# Altium PCB ADC_RS_MCU_draft.PcbDoc
Units mm, origin at the board's own origin, x right, y up, seen from the top; angles counter-clockwise.
Board outline 170 x 40 mm, 2 copper layers (Top Layer, Bottom Layer); 105 components, 74 nets, 361 pads, 0 vias.
Unrouted connection lines stored in the file: 245.
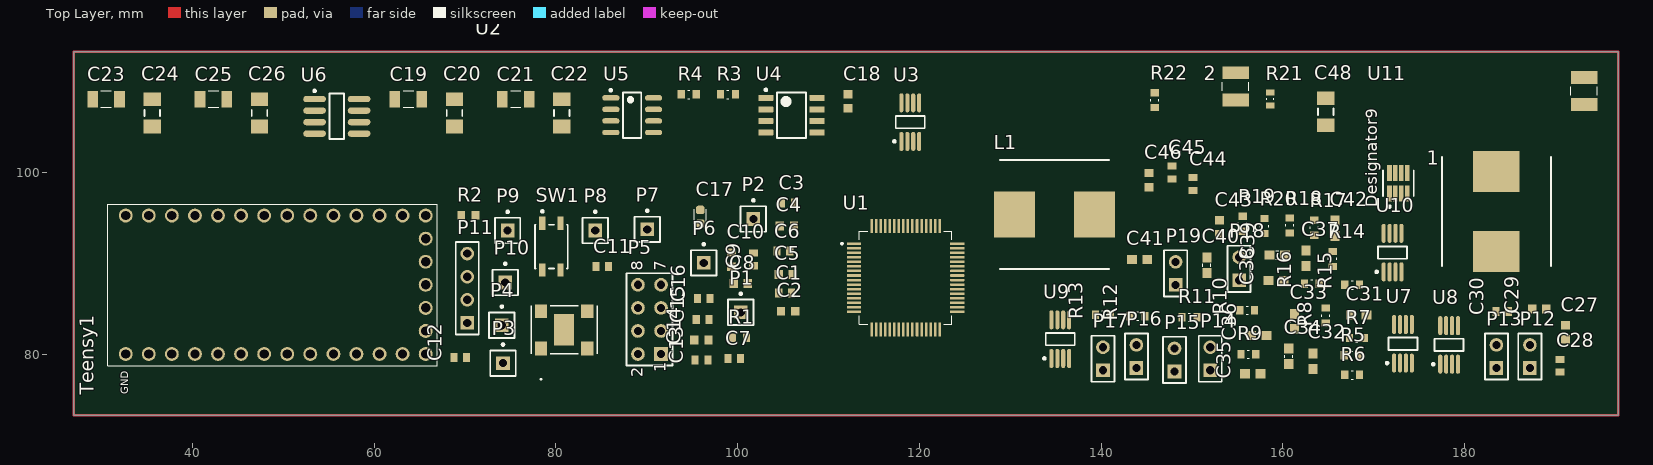
[diagram p0: Top Layer view]
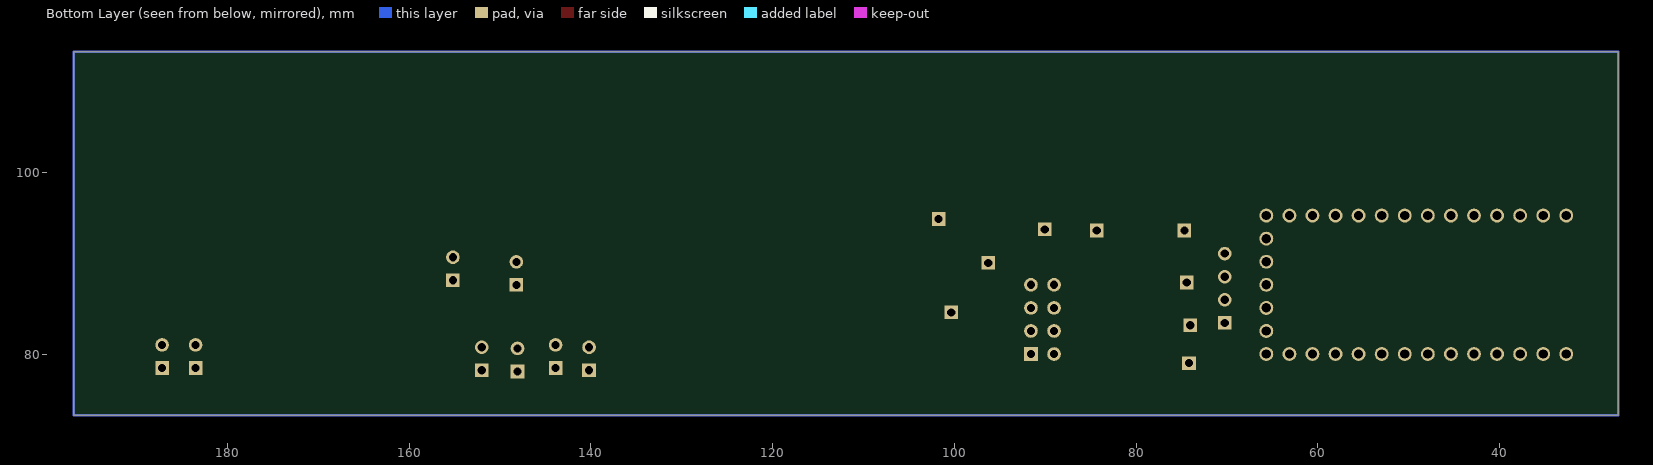
[diagram p1: Bottom Layer view, seen from below]

## Layer stack, top to bottom
Top Solder: solder mask 0.0102, Solder Resist, Dk 3.5
Top Layer: signal copper 0.0356
Dielectric 1: dielectric 0.32, FR-4, Dk 4.8
Bottom Layer: signal copper 0.0356
Bottom Solder: solder mask 0.0102, Solder Resist, Dk 3.5

## Board outline
26.924,73.279 26.924,113.279 196.924,113.279 196.924,73.279

## Design rules (kind name [scope] priority, off if disabled: settings)
Clearance [All] p1: gap=0.254 ignorepadtopadclearanceinfootprint=FALSE except(0: Arc-Hole Track-Hole SMDPad-Hole THPad-Hole Via-Hole Fill-Hole Poly-Hole Region-Hole Text-Hole)
PolygonConnect [All] p1: connectstyle=Relief reliefconductorwidth=0.254 reliefentries=4 polygonreliefangle="90 Angle" airgapwidth=0.254
RoomDefinition thvd8000 [InComponentClass('thvd8000')] p1: confinementstyle=ConfineIn formatcopy=TRUE lockcomponents=FALSE outline 129.921,95.758 195.072,95.758 195.072,112.141 129.921,112.141
RoomDefinition Vref [InComponentClass('Vref')] p2: confinementstyle=ConfineIn formatcopy=TRUE lockcomponents=FALSE outline 27.94,101.6 121.285,101.6 121.285,112.014 27.94,112.014
RoomDefinition driver0-3 [InComponentClass('driver0-3')] p3: confinementstyle=ConfineIn formatcopy=TRUE lockcomponents=FALSE outline 132.461,76.06 195.707,76.06 195.707,96.126 132.461,96.126
RoomDefinition ad7768 [InComponentClass('ad7768')] p4: confinementstyle=ConfineIn formatcopy=TRUE lockcomponents=FALSE outline 27.178,73.8 128.524,73.8 128.524,98.692 27.178,98.692
RoutingVias [All] p1: holewidth=0.711 width=1.27 viastyle="Through Hole" minholewidth=0.711 minwidth=1.27 maxholewidth=0.711 maxwidth=1.27
SolderMaskExpansion [All] p1: expansion=0.102 istentingtop=FALSE
Width [All] p1: maxlimit=0.254 minlimit=0.254 preferedwidth=0.254
30 further rules are at their usual default settings.

## Classes and differential pairs
component class Vref: C18 C19 C20 C21 C22 C23 C24 C25 C26 R3 R4 U3 U4 U5 U6
component class power_supply: 3 C50 C51
component class driver0-3: C27 C28 C29 C30 C31 C32 C33 C34 C35 C36 C37 C38 C39 C40 C41 C42 C43 C44 C45 C46 P12 P13 P14 P15 P16 P17 P18 P19 R5 R6 R7 R8 R9 R10 R11 R12 R13 R14 R15 R16 R17 R18 R19 R20 U7 U8 U9 U10
component class ad7768: C1 C2 C3 C4 C5 C6 C7 C8 C9 C10 C11 C12 C13 C14 C15 C16 C17 P1 P2 P3 P4 P5 P6 P7 P8 P9 P10 P11 R1 R2 SW1 Teensy1 U1 U2
component class accel: *1 R23 R24

## Components (designator, comment, footprint, x,y, rotation, side; value= is the part's Value field where it differs from the comment)
1 "MSS1278-124KLD" INDPM120120X805N 183.515,95.713 r90 top
2 "0.47uF-250V" CAPC3326X280N 154.813,109.474 r90 top
C1 "1u" CAPC1608X90N#1 105.221,86.754 r0 top
C2 "0.1uF" CAPC1608X90N#2 105.55,84.722 r0 top
C3 "1u" CAPC1608X90N#1 105.537,96.66 r0 top
C4 "0.1uF" CAPC1608X90N#2 105.423,94.12 r0 top
C5 "0.1uF" CAPC1608X90N#2 105.283,88.786 r0 top
C6 "1u" CAPC1608X90N#1 105.029,91.326 r0 top
C7 "1u" CAPC1608X90N#1 99.63,79.515 r0 top
C8 "0.1uF" CAPC1608X90N#2 100.33,87.757 r0 top
C9 "1u" CAPC1608X90N#1 101.727,90.424 r90 top
C10 "0.1uF" CAPC1608X90N#2 99.314,90.411 r90 top
C11 "1u" CAPC1608X90N#1 85.09,89.662 r0 top
C12 "1u" CAPC1608X90N#1 69.469,79.629 r180 top
C13 "1u" CAPC1608X90N#1 96.012,79.375 r180 top
C14 "0.1uF" CAPC1608X90N#2 96.012,81.534 r180 top
C15 "1u" CAPC1608X90N#1 96.139,83.82 r180 top
C16 "1u" CAPC1608X90N#1 96.266,86.106 r180 top
C17 "10uF" CAPC1608X9N 95.885,95.123 r90 top
C18 "0.1uF" CAPC1608X90N#2 112.141,107.823 r90 top
C19 "1u" CAPC3216X127N 63.754,108.077 r0 top
C20 "12065C104KAT2A" CAPC3216X94X50ML20T25 68.834,106.553 r90 top
C21 "1u" CAPC3216X127N 75.565,108.077 r0 top
C22 "12065C104KAT2A" CAPC3216X94X50ML20T25 80.645,106.553 r90 top
C23 "1u" CAPC3216X127N 30.48,108.077 r0 top
C24 "12065C104KAT2A" CAPC3216X94X50ML20T25 35.56,106.553 r90 top
C25 "1u" CAPC3216X127N 42.291,108.077 r0 top
C26 "12065C104KAT2A" CAPC3216X94X50ML20T25 47.371,106.553 r90 top
C27 "0.1uF" CAPC1608X90N#2 191.135,82.41 r90 top
C28 "1u" CAPC1608X90N#1 190.5,78.727 r90 top
C29 "0.1uF" CAPC1608X90N#2 188.227,84.95 r180 top
C30 "1u" CAPC1608X90N#1 184.15,84.696 r180 top
C31 "120pF" CAPC1608X90 168.363,84.315 r0 top
C32 "120pF" CAPC1608X90 163.322,79.235 r90 top
C33 "330pF" CAPC1608X90 161.29,83.592 r90 top
C34 "330pF" CAPC1608X90 160.655,79.743 r90 top
C35 "120pF" CAPC1608X90 156.718,77.838 r180 top
C36 "120pF" CAPC1608X90 157.353,82.029 r180 top
C37 "120pF" CAPC1608X90 162.56,90.538 r90 top
C38 "120pF" CAPC1608X90 159.258,88.125 r180 top
C39 "330pF" CAPC1608X90 159.385,90.919 r180 top
C40 "330pF" CAPC1608X90 151.638,89.776 r90 top
C41 "120pF" CAPC1608X90 144.233,90.411 r0 top
C42 "120pF" CAPC1608X90 165.735,93.84 r90 top
C43 "0.1uF" CAPC1608X90N#2 153.035,93.967 r90 top
C44 "1u" CAPC1608X90N#1 150.114,98.728 r90 top
C45 "1u" CAPC1608X90N#1 147.828,99.998 r90 top
C46 "0.1uF" CAPC1608X90N#2 145.288,99.161 r90 top
C48 "100nF" CAPC3216X94X50ML20T25 164.719,106.68 r90 top
L1 "MSS1278-124KLD" INDPM120120X805N 134.874,95.377 r0 top
P1 "Plug" PIN1 100.33,84.595 r0 top
P2 "Plug" PIN1 101.727,94.869 r0 top
P3 "Plug" PIN1 74.168,79.007 r0 top
P4 "Plug" PIN1 74.041,83.185 r0 top
P5 "Header 4X2" HDR2X4 91.567,80.01 r90 top
P6 "Plug" PIN1 96.266,90.043 r0 top
P7 "Plug" PIN1 90.043,93.726 r0 top
P8 "Plug" PIN1 84.328,93.612 r0 top
P9 "Plug" PIN1 74.676,93.612 r0 top
P10 "Plug" PIN1 74.422,87.884 r0 top
P11 "Header 4" HDR1X4 70.231,83.439 r90 top
P12 "Header 2" HDR1X2 187.198,78.473 r90 top
P13 "Header 2" HDR1X2 183.515,78.473 r90 top
P14 "Header 2" HDR1X2 152.019,78.219 r90 top
P15 "Header 2" HDR1X2 148.082,78.092 r90 top
P16 "Header 2" HDR1X2 143.891,78.473 r90 top
P17 "Header 2" HDR1X2 140.208,78.219 r90 top
P18 "Header 2" HDR1X2 155.194,88.125 r90 top
P19 "Header 2" HDR1X2 148.209,87.617 r90 top
R1 "100" RESC1508X55N 100.194,81.801 r0 top
R2 "ESR03EZPF1001" RESC1608X55N#1 70.358,95.263 r0 top
R3 "1k" RESC1608X55N#2 98.933,108.585 r0 top
R4 "2k" RESC1608X55N#2 94.615,108.585 r0 top
R5 "33" RESC1608X55N#2 167.582,79.87 r0 top
R6 "33" RESC1608X55N#2 167.64,77.711 r0 top
R7 "1M" RESC1608X55N#2 168.148,81.775 r0 top
R8 "1M" RESC1608X55N#2 164.719,84.246 r90 top
R9 "33" RESC1608X55N#2 156.21,79.997 r0 top
R10 "33" RESC1608X55N#2 156.083,84.823 r180 top
R11 "1M" RESC1608X55N#2 149.733,84.061 r0 top
R12 "1M" RESC1608X55N#2 144.018,84.188 r180 top
R13 "1M" RESC1608X55N#2 140.208,84.315 r180 top
R14 "33" RESC1608X55N#2 165.481,90.48 r90 top
R15 "33" RESC1608X55N#2 167.64,87.617 r180 top
R16 "1M" RESC1608X55N#2 163.195,87.744 r180 top
R17 "33" RESC1608X55N#2 163.449,93.909 r90 top
R18 "33" RESC1608X55N#2 160.782,94.163 r90 top
R19 "1M" RESC1608X55N#2 155.575,94.348 r90 top
R20 "1M" RESC1608X55N#2 157.988,94.094 r90 top
R21 "120" RES_ERA3AEB121V 158.623,108.077 r90 top
R22 "1.5k" RESC1608X55N#2 145.923,107.95 r90 top
SW1 "EVQ-P2202M" FP-EVQ-P2202M-MFG 79.502,91.834 r0 top
Teensy1 "DEV-15583" MODULE_DEV-15583 49.149,87.63 r90 top
U1 "AD7768-4BSTZ" QFP50P1200X1200X160-64N 118.491,88.405 r0 top
U2 "DSC1001AI2-032.7680" DFN4_7X5_MCH 80.899,82.677 r90 top
U3 "ADR435BRMZ-R7" ADI-RM-8_M 118.999,105.537 r90 top
U4 "REG103UA-5" D0008A_M 105.918,106.299 r0 top
U5 "ADR4533BRZ" ADI-R-8_L 88.392,106.299 r0 top
U6 "ADR4540BRZ" ADI-R-8_M 55.88,106.172 r0 top
U7 "ADA4841-2YRMZ-RL" ADI-RM-8_M 173.228,81.14 r90 top
U8 "ADA4841-2YRMZ-RL" ADI-RM-8_M 178.308,81.013 r90 top
U9 "ADA4841-2YRMZ-RL" ADI-RM-8_M 135.509,81.648 r90 top
U10 "ADA4841-2YRMZ-RL" ADI-RM-8_M 172.085,91.173 r90 top
U11 "THVD8000DDFR" DDF0008A-IPC_A 172.72,98.806 r90 top
? "0.47uF-250V" CAPC3326X280N 193.167,108.966 r90 top

## Footprints (in the part's own frame and the unit in brackets; to place one, negate y for a bottom-side part, rotate by r counter-clockwise, add the part's x,y. Pads: shape width x height; smd on the part's side, far side on the other; paste and mask are expansions set on the pad)
ADI-R-8_L [mm] "SOIC, 8-Leads, Body 4.9x3.9mm, Pitch 1.27mm, IPC High Density"
  oval 1.9x0.6 smd: 1(-2.35,1.905) 2(-2.35,0.635) 3(-2.35,-0.635) 4(-2.35,-1.905) 5(2.35,-1.905) 6(2.35,-0.635) 7(2.35,0.635) 8(2.35,1.905)
  silkscreen extent -2.47,-2.5 1,2.88, body extent -2,-2.5 2,2.5, height 1.75
ADI-R-8_M [mm] "SOIC, 8-Leads, Body 4.9x3.9mm, Pitch 1.27mm, IPC Low Density"
  oval 2.5x0.7 smd: 1(-2.45,1.905) 2(-2.45,0.635) 3(-2.45,-0.635) 4(-2.45,-1.905) 5(2.45,-1.905) 6(2.45,-0.635) 7(2.45,0.635) 8(2.45,1.905)
  silkscreen extent -2.57,-2.5 0.8,2.93, body extent -2,-2.5 2,2.5, height 1.75
ADI-RM-8_M [mm] "SOP, 8-Leads, Body 3x3mm, Pitch 0.65mm, IPC Low Density"
  oval 2.1x0.45 smd: 1(-2.125,0.975) 2(-2.125,0.325) 3(-2.125,-0.325) 4(-2.125,-0.975) 5(2.125,-0.975) 6(2.125,-0.325) 7(2.125,0.325) 8(2.125,0.975)
  silkscreen extent -2.25,-1.6 0.67,1.87, body extent -1.6,-1.6 1.6,1.6, height 1.1
CAPC1608X9N [mm]
  rrect50% 0.93x0.93 smd: 1(-0.75,0) 2(0.75,0)
  silkscreen extent -0.8,-0.64 0.8,0.64, body extent -0.8,-0.4 0.8,0.4, height 0.4
CAPC1608X90 [mm]
  rect 1.1x1 smd: 1(-0.85,0) 2(0.85,0)
  body extent -0.8,-0.41 0.8,0.41, height 0.45
CAPC1608X90N#1 [mm]
  rect 0.78x0.99 smd: 1(-0.7,0) 2(0.7,0)
  body extent -0.8,-0.41 0.8,0.41, height 0.9
CAPC1608X90N#2 [mm]
  rect 0.92x0.98 smd: 1(-0.775,0) 2(0.775,0)
  body extent -0.8,-0.41 0.8,0.41, height 0.9
CAPC3216X94X50ML20T25 [mm] "Chip Capacitor, 2-Leads, Body 3.20x1.60mm, IPC Low Density"
  rect 1.5x1.9 smd: 1(-1.5,0) 2(1.5,0)
  silkscreen extent -0.35,-0.85 0.35,0.85, body extent -1.7,-0.9 1.7,0.9, height 0.94
CAPC3216X127N [mm]
  rect 1.16x1.82 smd: 1(-1.475,0) 2(1.475,0)
  silkscreen extent -0.57,-0.9 0.57,0.9, body extent -1.6,-0.8 1.6,0.8, height 1.27
CAPC3326X280N [mm]
  rect 1.42x2.91 smd: 1(-1.492,0) 2(1.492,0)
  silkscreen extent -0.46,-1.45 0.46,1.45, body extent -1.65,-1.3 1.65,1.3, height 2.8
D0008A_M [mm] "SOIC, 8-Leads, Body 5x4mm, Pitch 1.27mm, IPC Low Density"
  rrect15% 1.65x0.65 smd: 1(-2.825,1.905) 2(-2.825,0.635) 3(-2.825,-0.635) 4(-2.825,-1.905) 5(2.825,-1.905) 6(2.825,-0.635) 7(2.825,0.635) 8(2.825,1.905)
  silkscreen extent -2.95,-2.5 1.6,2.9, body extent -3,-2.45 3,2.45, height 1.63
DDF0008A-IPC_A [mm]
  rect 1.757x0.512 smd paste+0 mask+0: 1(-1.151,0.975) 2(-1.151,0.325) 3(-1.151,-0.325) 4(-1.151,-0.975) 5(1.151,-0.975) 6(1.151,-0.325) 7(1.151,0.325) 8(1.151,0.975)
  silkscreen extent -2.7,-1.7 1.4,1.7, body extent 0,0 0.25,0.25, height 0.25
DFN4_7X5_MCH [mm]
  rect 1.505x1.349 smd paste+0 mask+0: 1(-2.052,2.54) 2(-2.052,-2.54) 3(2.052,-2.54) 4(2.052,2.54)
  rect 3.5x2.2 smd paste+0 mask+0: 5(0,0)
  silkscreen extent -5.52,-3.63 2.63,3.63, body extent -2.5,-3.5 2.5,3.5, height 0.85
FP-EVQ-P2202M-MFG [mm]
  rect 0.7x1.45 smd paste+0 mask+0: 1(-1,2.575) 2(1,2.575) 3(-1,-2.575) 4(1,-2.575)
  silkscreen extent -1.8,-2.4 1.8,4, body extent -1.9,-3.4 1.9,3.4, height 0.25
HDR1X2 [mm] "Connector; Header; 2 Position"
  rect 1.5x1.5 hole 0.9: 1(0,0)
  round 1.5 hole 0.9: 2(2.54,0)
  silkscreen extent -1.27,-1.27 3.81,1.27
HDR1X4 [mm] "Connector; Header; 4 Position"
  rect 1.5x1.5 hole 0.9: 1(0,0)
  round 1.5 hole 0.9: 2(2.54,0) 3(5.08,0) 4(7.62,0)
  silkscreen extent -1.27,-1.27 8.89,1.27
HDR2X4 [mm] "Connector; Header; 4x2 Position"
  rect 1.5x1.5 hole 0.9: 1(0,0)
  round 1.5 hole 0.9: 2(0,2.54) 3(2.54,0) 4(2.54,2.54) 5(5.08,0) 6(5.08,2.54) 7(7.62,0) 8(7.62,2.54)
  silkscreen extent -1.27,-1.27 8.89,3.81
INDPM120120X805N [mm]
  rect 4.5x5.1 smd: 1(-4.4,0) 2(4.4,0)
  silkscreen extent -6,-6 6,6, body extent -6,-6 6,6, height 8.05
MODULE_DEV-15583 [mm]
  round 1.53 hole 1.02: 0(-7.62,13.97) 1(-7.62,11.43) 2(-7.62,8.89) 3(-7.62,6.35) 3.3V_1(-2.54,-16.51) 3.3V_2(7.62,11.43) 4(-7.62,3.81) 5(-7.62,1.27) 6(-7.62,-1.27) 7(-7.62,-3.81) 8(-7.62,-6.35) 9(-7.62,-8.89) 10(-7.62,-11.43) 11(-7.62,-13.97) 12(-7.62,-16.51) 13(7.62,-16.51) 14(7.62,-13.97) 15(7.62,-11.43) 16(7.62,-8.89) 17(7.62,-6.35) 18(7.62,-3.81) 19(7.62,-1.27) 20(7.62,1.27) 21(7.62,3.81) 22(7.62,6.35) 23(7.62,8.89) G1(-7.62,16.51) G2(0,-16.51) G3(7.62,13.97) ON-OFF(5.08,-16.51) PGM(2.54,-16.51) VBAT(-5.08,-16.51) VIN(7.62,16.51)
  silkscreen extent -8.89,-17.78 8.89,18.48
PIN1 [mm] "Connector; Plug"
  rect 1.5x1.5 hole 0.9: 1(0,0)
  silkscreen extent -1.4,-1.4 1.4,2.17
QFP50P1200X1200X160-64N [mm]
  rrect25% 1.56x0.28 smd mask+0.051: 1(-5.68,3.75) 2(-5.68,3.25) 3(-5.68,2.75) 4(-5.68,2.25) 5(-5.68,1.75) 6(-5.68,1.25) 7(-5.68,0.75) 8(-5.68,0.25) 9(-5.68,-0.25) 10(-5.68,-0.75) 11(-5.68,-1.25) 12(-5.68,-1.75) 13(-5.68,-2.25) 14(-5.68,-2.75) 15(-5.68,-3.25) 16(-5.68,-3.75) 33(5.68,-3.75) 34(5.68,-3.25) 35(5.68,-2.75) 36(5.68,-2.25) 37(5.68,-1.75) 38(5.68,-1.25) 39(5.68,-0.75) 40(5.68,-0.25) 41(5.68,0.25) 42(5.68,0.75) 43(5.68,1.25) 44(5.68,1.75) 45(5.68,2.25) 46(5.68,2.75) 47(5.68,3.25) 48(5.68,3.75)
  rrect25% 0.28x1.56 smd mask+0.051: 17(-3.75,-5.68) 18(-3.25,-5.68) 19(-2.75,-5.68) 20(-2.25,-5.68) 21(-1.75,-5.68) 22(-1.25,-5.68) 23(-0.75,-5.68) 24(-0.25,-5.68) 25(0.25,-5.68) 26(0.75,-5.68) 27(1.25,-5.68) 28(1.75,-5.68) 29(2.25,-5.68) 30(2.75,-5.68) 31(3.25,-5.68) 32(3.75,-5.68) 49(3.75,5.68) 50(3.25,5.68) 51(2.75,5.68) 52(2.25,5.68) 53(1.75,5.68) 54(1.25,5.68) 55(0.75,5.68) 56(0.25,5.68) 57(-0.25,5.68) 58(-0.75,5.68) 59(-1.25,5.68) 60(-1.75,5.68) 61(-2.25,5.68) 62(-2.75,5.68) 63(-3.25,5.68) 64(-3.75,5.68)
  silkscreen extent -7.11,-5.1 5.1,5.1
RES_ERA3AEB121V [mm]
  rect 0.65x0.9 smd: 1(-0.725,0) 2(0.725,0)
  silkscreen extent -0.08,-0.4 0.08,0.4, body extent -0.8,-0.4 0.8,0.4, height 0.45
RESC1508X55N [mm]
  rect 0.81x0.98 smd: 1(-0.771,0) 2(0.771,0)
  body extent -0.77,-0.43 0.77,0.43, height 0.55
RESC1608X55N#1 [mm]
  rect 0.87x0.93 smd: 1(-0.78,0) 2(0.78,0)
  body extent -0.8,-0.4 0.8,0.4, height 0.55
RESC1608X55N#2 [mm]
  rect 0.79x0.93 smd: 1(-0.82,0) 2(0.82,0)
  silkscreen extent -0.11,-0.45 0.11,0.45, body extent -0.8,-0.4 0.8,0.4, height 0.55

## Part data
1 L1: "Inductor", Manufacturer_Name=COILCRAFT, Datasheet Link=https://componentsearchengine.com/Datasheets/1/MSS1278-124KLD.pdf, Height=8.05mm, Manufacturer_Part_Number=MSS1278-124KLD
2 ?: library part C1210X474KARACAUTO, Package=None, Availability=Unavailable, MF="{'manufacturer': u'KEMET'}", MP=C1210X474KARACAUTO, Price=None
C1 C3 C6 C7 C9 C11 C12 C13 C15 C16 C28 C30 C44 C45: library part 0603YC105MAT4A, "Capacitor", Manufacturer_Name=AVX, Datasheet Link=https://componentsearchengine.com/Datasheets/1/06031A100FAT2A.pdf, Height=0.9mm, Manufacturer_Part_Number=0603YC105MAT4A
C2 C4 C5 C8 C10 C14 C18 C27 C29 C43 C46: library part 06033D104KAT2A, "Cap Ceramic 0.1uF 25V X5R 10% SMD 0603 85ÂÂŽ T/R", Package=None, Availability=Unavailable, MF="{'manufacturer': u'AVX'}", MP=06033D104KAT2A, Price=None
C17: library part GRT188R61A106ME13D, "CAP CER 10UF 10V X5R 0603", Package=None, Availability=Unavailable, MF="{'manufacturer': u'Murata'}", MP=GRT188R61A106ME13D, Price=None
C19 C21 C23 C25: library part 1206YC105KAT2A, "Cap Ceramic 1uF 16V X7R 10% SMD 1206 125ÂÂŽ T/R", Package=None, Availability=Unavailable, MF="{'manufacturer': u'AVX'}", MP=1206YC105KAT2A, Price=None
C20 C22 C24 C26: library part CMP-2000-05018-1, "Chip Capacitor, Ceramic, 100 nF, 10%, 50 V, 1206, RoHS, Tape and Reel", Capacitance=100nF, Case Size/Dimension=1206, Dielectric=X7R, Manufacturer=AVX, Rated Voltage=50V, Tolerance (%)=±10%, Datasheet URL=http://www.mouser.com/ds/2/40/cauto-360.pdf, Datasheet Version=Sep-14, Manufacturer URL=http://www.avx.com/
C31 C32 C35 C36 C37 C38 C41 C42: library part 06035A121GAT2A, "0603 120 pF 50 V Â±2 % Tolerance C0G/NP0 SMT Multilayer Ceramic Capacitor", Package=None, Availability=Unavailable, MF="{'manufacturer': u'AVX'}", MP=06035A121GAT2A, Price=None
C33 C34 C39 C40: library part 06033A331GAT2A, "0603 SMD Ceramic Capacitors 0603 330pF 25volts C0G 2%", Package=None, Availability=Unavailable, MF="{'manufacturer': u'AVX'}", MP=06033A331GAT2A, Price=None
C48: library part CMP-2000-05018-1, "Chip Capacitor, Ceramic, 100 nF, 10%, 50 V, 1206, RoHS, Tape and Reel", Case Size/Dimension=1206, Dielectric=X7R, Manufacturer=AVX, Rated Voltage=50V, Tolerance (%)=±10%, Capacitance=100nF, Datasheet URL=http://www.mouser.com/ds/2/40/cauto-360.pdf, Datasheet Version=Sep-14, Manufacturer URL=http://www.avx.com/
P5: "Header, 4-Pin, Dual row", LatestRevisionDate=17-Jul-2002, LatestRevisionNote="Re-released for DXP Platform.", Publisher="Altium Limited"
P11: "Header, 4-Pin", LatestRevisionDate=17-Jul-2002, LatestRevisionNote="Re-released for DXP Platform.", Publisher="Altium Limited"
P12 P13 P14 P15 P16 P17 P18 P19: "Header, 2-Pin", LatestRevisionDate=17-Jul-2002, LatestRevisionNote="Re-released for DXP Platform.", Publisher="Altium Limited"
R1: library part MCT0603MD1000DP500, Package=None, Availability=Unavailable, MF="{'manufacturer': u'Vishay'}", MP=MCT0603MD1000DP500, Price=None
R2: "Res 0603 1K Ohm 1% 1/4W Â±100ppm/Â°C Molded SMD Paper T/R", Package=None, Availability=Unavailable, MF="{'manufacturer': u'Rohm'}", MP=ESR03EZPF1001, Price=None
R3 R4 R5 R6 R9 R10 R14 R15 R17 R18: library part RT0603BRD0733RL, "RES SMD 33 OHM 0.1% 1/10W 0603", Package=None, Availability=Unavailable, MF="{'manufacturer': u'Yageo'}", MP=RT0603BRD0733RL, Price=None
R7 R8 R11 R12 R13 R16 R19 R20: library part RT0603DRD071ML, Package=None, Availability=Unavailable, MF="{'manufacturer': u'Yageo'}", MP=RT0603DRD071ML, Price=None
R21: library part ERA3AEB121V, Package=None, Availability=Unavailable, MF="{'manufacturer': u'Panasonic'}", MP=ERA3AEB121V, Price=None
R22: library part RT0603BRD071K5L, Package=None, Availability=Unavailable, MF="{'manufacturer': u'Yageo'}", MP=RT0603BRD071K5L, Price=None
SW1: library part CMP-05618-000029-1, "SWITCH TACTILE SPST-NO 0.02A 15V", Actuator Color=Natural, Contact Current Rating=20mA, Contact Resistance=100mR, Max Operating Temperature=85°C, Max Voltage Rating (DC)=15V, Min Operating Temperature=-40°C, Operating Force=1.6N, Package Quantity=1, Actuator Length=0.45mm, Color=Natural, Contact Plating=Gold, Current Rating=20mA, Depth=5.5mm, Electrical Life=1000000Cycles, Height=2.1mm, Illumination Type=Non-Illuminated, Lead Free="Lead Free", Length=3.5mm, Max Current Rating=20mA, Mechanical Life=1000000Cycles, Mount="Surface Mount", Orientation=Straight, Packaging="Tape and Reel", Radiation Hardening=No, REACH SVHC="No SVHC", Series=EVQP2, Size=3.5mm, Switch Function=Off-Mom, Switch Travel=0.25mm, Termination=J-Bend, Throw Configuration=SPST, Voltage Rating (DC)=15V
Teensy1: "RT1062 Teensy 4.0 i.MX ARMÂ® CortexÂ®-M7 MPU Embedded Evaluation Board", Package=None, Digi-Key_Part_Number=1568-DEV-15583-ND, Digi-Key_Purchase_URL=https://www.digikey.com/product-detail/en/sparkfun-electronics/DEV-15583/1568-DEV-15583-ND/10384551?utm_source=snapeda&utm_medium=aggregator&utm_campaign=symbol, MF="SparkFun Electronics", MP=DEV-15583, SnapEDA_Link=https://www.snapeda.com/parts/DEV-15583/SparkFun%20Electronics/view-part/4001229/?ref=snap
U1: "24 Bit Analog to Digital Converter 4 Input 4 Sigma-Delta 64-LQFP _10x10_", Package="LQFP -64 Analog Devices", Digi-Key_Part_Number=AD7768-4BSTZ-ND, Digi-Key_Purchase_URL=https://www.digikey.com/product-detail/en/analog-devices-inc/AD7768-4BSTZ/AD7768-4BSTZ-ND/6072260?utm_source=snapeda&utm_medium=aggregator&utm_campaign=symbol, MF="Analog Devices", MP=AD7768-4BSTZ, SnapEDA_Link=https://www.snapeda.com/parts/AD7768-4BSTZ/Analog%20Devices%20Inc./view-part/501603/?ref=snap
U2: "No Description Available", Mfr_Name=Microchip, Copyright="Copyright (C) 2021 Ultra Librarian. All rights reserved.", Digi-Key_Part_Number_1=DSC1001AI2-032.7680-ND, Manufacturer_Part_Number=DSC1001AI2-032.7680, RefDes=RefDes, Type=DEV
U3: library part CMP-0784-00373-1, "Ultralow Noise XFET Voltage Reference with Current Sink and Source Capability, 5 V Output, 7 to 18 V Supply, Industrial, 8-pin SOP (RM-8), Reel", Manufacturer="Analog Devices", Operating Temp Range="-40 to 125 degC", Code_JEDEC=MO-187-AA, ComponentLink1Description="Manufacturer URL", ComponentLink1URL=http://www.analog.com/en/index.html, ComponentLink2Description=Datasheet, ComponentLink2URL=http://www.analog.com/static/imported-files/data_sheets/ADR430_431_433_434_435_439.pdf, ComponentLink3Description="Package Specification", ComponentLink3URL=http://www.analog.com/static/imported-files/packages/PKG_PDF/MSOP%28RM%29/RM_8.pdf, ComponentLink4Description="URL Link1", ComponentLink4URL="Product URL:http://www.analog.com/en/special-linear-functions/voltage-references/adr435/products/product.html", DatasheetVersion="Rev. J", Max V Supply (V)=18, Min V Supply (V)=7, Mounting Technology="Surface Mount", PackageDescription="8-Pin Mini Small Outline Package, Body 3 x 3 mm, Pitch 0.65 mm", PackageReference=RM-8, PackageVersion=Aug-05, Packing=Reel, PartNumber=ADR435BRMZ-R7, Ref Out TC (ppm/C)=1, Vout=5V
U4: library part CMP-0395-00135-2, "Single Output Fast Transient Response LDO, 500 mA, Fixed 5 V Output, 2.1 to 15 V Input, 8-pin SOIC (D), -55 to 125 degC, Green (RoHS & no Sb/Br)", Manufacturer="Texas Instruments", Power Good=TRUE, Accuracy(%)=2, Code_JEDEC=MS-012, ComponentLink1Description="Manufacturer URL", ComponentLink1URL=http://www.ti.com/, ComponentLink2Description=Datasheet, ComponentLink2URL=http://www.ti.com/general/docs/lit/getliterature.tsp?genericPartNumber=REG103-5&fileType=pdf, ComponentLink3Description="Package Specification", ComponentLink3URL=http://www.ti.com/litv/pdf/msoi002j, DatasheetVersion=SBVS010D, Eco-Plan="Green (RoHS & no Sb/Br)", Fixed Output Options(V)=5, Iout(Max)(A)=0.5, Iq(Typ)(mA)=0.5, Mounting Technology="Surface Mount", PackageDescription="8-Pin Plastic Small Outline, Body 4.9 x 3.9 mm, Pitch 1.27 mm", PackageReference=D0008A, PackageVersion=4040047-3/M, PartNumber=REG103UA-5, SubFamily="Single Channel LDO", Vdo(Typ)(mV)=160, Vin(Max)(V)=15, Vin(Min)(V)=2.1, Vout Adj(Max)(V)=5, Vout Adj(Min)(V)=5
U5: library part CMP-0784-00188-1, "Ultralow Noise, High Accuracy Voltage Reference, 3.3 V Output, 3 to 15 V Supply, Industrial, 8-pin SOIC (R-8), Tube", Manufacturer="Analog Devices", Operating Temp Range="-40 to 125 degC", Code_JEDEC=MS-012-AA, ComponentLink1Description="Manufacturer URL", ComponentLink1URL=http://www.analog.com/en/index.html, ComponentLink2Description=Datasheet, ComponentLink2URL=http://www.analog.com/static/imported-files/data_sheets/ADR4520_4525_4530_4533_4540_4550.pdf, ComponentLink3Description="Package Specification", ComponentLink3URL=http://www.analog.com/static/imported-files/packages/PKG_PDF/SOIC_Narrow%20(R)/R_8.pdf, ComponentLink4Description="URL Link1", ComponentLink4URL="Product URL:http://www.analog.com/en/special-linear-functions/voltage-references/adr4533/products/product.html", DatasheetVersion="Rev. 0", Max V Supply (V)=15, Min V Supply (V)=3, Mounting Technology="Surface Mount", PackageDescription="8-Pin Standard Small Outline Package, Body 4.9 x 3.9 mm, Pitch 1.27 mm", PackageReference=R-8, PackageVersion="060506-A, 06/2006", Packing=Tube, PartNumber=ADR4533BRZ, Ref Out TC (ppm/C)=2, Vout=3.3V
U6: library part CMP-0784-00192-1, "Ultralow Noise, High Accuracy Voltage Reference, 4.096 V Output, 3 to 15 V Supply, Industrial, 8-pin SOIC (R-8), Tube", Manufacturer="Analog Devices", Operating Temp Range="-40 to 125 degC", Code_JEDEC=MS-012-AA, ComponentLink1Description="Manufacturer URL", ComponentLink1URL=http://www.analog.com/en/index.html, ComponentLink2Description=Datasheet, ComponentLink2URL=http://www.analog.com/static/imported-files/data_sheets/ADR4520_4525_4530_4533_4540_4550.pdf, ComponentLink3Description="Package Specification", ComponentLink3URL=http://www.analog.com/static/imported-files/packages/PKG_PDF/SOIC_Narrow%20(R)/R_8.pdf, ComponentLink4Description="URL Link1", ComponentLink4URL="Product URL:http://www.analog.com/en/special-linear-functions/voltage-references/adr4540/products/product.html", DatasheetVersion="Rev. 0", Max V Supply (V)=15, Min V Supply (V)=3, Mounting Technology="Surface Mount", PackageDescription="8-Pin Standard Small Outline Package, Body 4.9 x 3.9 mm, Pitch 1.27 mm", PackageReference=R-8, PackageVersion="060506-A, 06/2006", Packing=Tube, PartNumber=ADR4540BRZ, Ref Out TC (ppm/C)=2, Vout=4.096V
U7 U8 U9 U10: library part CMP-0384-01677-1, "Double Channel Low Wide Band Noise Operational Amplifier, 80 MHz BW, 13 V/us SR, Industrial, 8-pin SOP (RM-8), Reel", Amplifiers Per Package=2, Generic Part Number=ADA4841-2, Input Bias Current=3uA, Input Offset Voltage=40uV, Manufacturer="Analog Devices", Code_JEDEC=MO-187-AA, ComponentLink1Description="Manufacturer URL", ComponentLink1URL=http://www.analog.com/en/index.html, ComponentLink2Description=Datasheet, ComponentLink2URL=http://www.analog.com/static/imported-files/data_sheets/ADA4841-1_4841-2.pdf, ComponentLink3Description="Package Specification", ComponentLink3URL=http://www.analog.com/static/imported-files/packages/PKG_PDF/MSOP%28RM%29/RM_8.pdf, DatasheetVersion="Rev. E", Iq/Amp=1.5mA, Mounting Technology="Surface Mount", PackageDescription="8-Pin Mini Small Outline Package, Body 3 x 3 mm, Pitch 0.65 mm", PackageReference=RM-8, PartNumber=ADA4841-2YRMZ-RL, Slew Rate=13V/us, Small Signal Bandwidth=80MHz, V Span Max=12V, V Span Min=2.7V
U11: "No Description Available", Mfr_Name="Texas Instruments", Copyright="Copyright (C) 2021 Ultra Librarian. All rights reserved.", Manufacturer_Part_Number=THVD8000DDFR, RefDes=RefDes, Type=DEV
P1 P2 P3 P4 P6 P7 P8 P9 P10: LatestRevisionDate=17-Jul-2002, LatestRevisionNote="Re-released for DXP Platform.", Publisher="Altium Limited"

## Nets (pads, with @x,y where several pads share a name; then routed paths per layer and width w, separated by ;. In a path a pad name is that pad's centre, name@x,y a point inside that pad or via, vN(x,y) a via of type N, cw(c..) or ccw(c..) an arc to the next point about the centre after c; other vN are vias at no path point)
5V: C1.2 C2.1 C5.1 C7.2 C10.1 C11.2 C14.1 C15.2 C19.2 C20.1 C23.2 C24.1 C27.1 C28.1 C29.1 C30.1 C43.1 C44.1 C45.1 C46.1 P1.1 Teensy1.VIN U1.4 U1.45 U1.53 U1.60 U4.1 U4.2 U5.2 U6.2 U7.8 U8.8 U9.8 U10.8
"5V ref": C18.1 P9.1 U3.6
12V: P8.1 R3.2 U3.2 U4.7 U4.8
A: 1.2
AIN0+: P13.2 U1.64
AIN0-: P15.2 U1.63
AIN1+: P17.2 U1.2
AIN1-: P19.2 U1.1
AIN2+: P12.2 U1.49
AIN2-: P14.2 U1.50
AIN3+: P16.2 U1.47
AIN3-: P18.2 U1.48
B: L1.2
CS: Teensy1.10 U1.16
DCLK: Teensy1.6 U1.28
DOUT0: Teensy1.2 U1.27
DOUT1: Teensy1.3 U1.26
DOUT2: Teensy1.4 U1.25
DOUT3: Teensy1.5 U1.24
DRDY: Teensy1.18 U1.29
GND: C1.1 C2.2 C3.1 C3.2 C4.2 C5.2 C6.1 C7.1 C8.2 C9.1 C10.2 C11.1 C12.1 C13.1 C14.2 C15.1 C16.1 C17.1 C18.2 C19.1 C20.2 C21.1 C22.2 C23.1 C24.2 C25.1 C26.2 C27.2 C28.2 C29.2 C30.2 C31.1 C32.1 C35.2 C36.2 C37.1 C38.1 C41.2 C42.2 C43.2 C44.2 C45.2 C46.2 P2.1 P4.1 P6.1 P7.1 R2.2 R4.2 R7.1 R8.2 R11.1 R12.2 R13.1 R16.1 R19.1 R20.1 R22.1 Teensy1.G3 U1.3 U1.5 U1.7 U1.8 U1.9 U1.10 U1.31 U1.33 U1.39 U1.40 U1.41 U1.42 U1.46 U1.51 U1.54 U1.55 U1.56 U1.58 U1.62 U2.2 U2.5 U3.4 U4.4 U5.4 U6.4 U7.4 U8.4 U9.4 U10.4 U11.5
IN0+: P5.1 U7.3
IN0-: P5.2 R11.2 U8.5
IN1+: P5.3 R16.2 U10.3
IN1-: P5.4 R19.2 U10.5
IN2+: P5.5 R8.1 U8.3
IN2-: P5.6 R12.1 U7.5
IN3+: P5.7 U9.3
IN3-: P5.8 R20.2 U9.5
MODE: Teensy1.9 U11.2
Net1_1: 1.1 ?.2
Net2_1: 2.1 C48.2 R21.1 U11.6
Net2_2: 2.2 L1.1
Net*1_17: 
Net_1: ?.1 C48.1 R21.2 U11.7
NetC12_2: C12.2 U1.44
NetC13_2: C13.2 U1.61
NetC16_2: C16.2 U1.52
NetC17_2: C17.2 U1.34
NetC31_2: C31.2 C34.1 P12.1 R6.2
NetC32_2: C32.2 C33.1 P13.1 R5.2
NetC33_2: C33.2 C36.1 P15.1 R10.2
NetC34_2: C34.2 C35.1 P14.1 R9.2
NetC37_2: C37.2 C39.1 P16.1 R15.2
NetC38_2: C38.2 C40.1 P17.1 R14.2
NetC39_2: C39.2 C41.1 P18.1 R17.2
NetC40_2: C40.2 C42.1 P19.1 R18.2
NetP11_1: P11.1 U1.15
NetP11_2: P11.2 U1.14
NetP11_3: P11.3 U1.13
NetP11_4: P11.4 U1.12
NetR2_1: R2.1 SW1.2
NetR3_1: R3.1 R4.1 U4.5
NetR5_1: R5.1 U7.1 U7.2
NetR6_1: R6.1 U8.1 U8.2
NetR9_1: R9.1 U7.6 U7.7
NetR10_1: R10.1 U8.6 U8.7
NetR14_1: R14.1 U10.1 U10.2
NetR15_1: R15.1 U9.1 U9.2
NetR17_1: R17.1 U9.6 U9.7
NetR18_1: R18.1 U10.6 U10.7
NetR22_2: R22.2 U11.3
NetSW1_4: SW1.4 U1.30
NetU1_32: U1.32 U2.3
RS485RX: Teensy1.15 U11.1
RS485TX: Teensy1.14 U11.4
SCLK: Teensy1.13 U1.17
SDI: Teensy1.11 U1.18
SDO: Teensy1.12 U1.19
START: P10.1 U1.37
SYNC: U1.36 U1.38
V3ref: C21.2 C22.1 SW1.1 SW1.3 U1.11 U1.35 U1.57 U2.1 U2.4 U5.6 U11.8
V4ref: C4.1 C6.2 C8.1 C9.2 C25.2 C26.1 U1.6 U1.43 U6.6
VCM: P3.1 U1.59
pads on no net: R1.1 R1.2 R7.2 R13.2 Teensy1.0 Teensy1.1 Teensy1.3.3V_1 Teensy1.3.3V_2 Teensy1.7 Teensy1.8 Teensy1.16 Teensy1.17 Teensy1.19 Teensy1.20 Teensy1.21 Teensy1.22 Teensy1.23 Teensy1.G1 Teensy1.G2 Teensy1.ON-OFF Teensy1.PGM Teensy1.VBAT U1.20 U1.21 U1.22 U1.23 U3.1 U3.3 U3.5 U3.7 U3.8 U4.3 U4.6 U5.1 U5.3 U5.5 U5.7 U5.8 U6.1 U6.3 U6.5 U6.7 U6.8

## Other copper
Multi-Layer:
  the board outline again, w0.254

## Text inside footprints (layer, text, board x,y; h text height)
P5: Top Overlay "2" at 89.535,77.47 h1.27 r90; Top Overlay "1" at 92.075,77.978 h1.27 r90; Top Overlay "7" at 92.075,89.154 h1.27 r90; Top Overlay "8" at 89.535,89.154 h1.27 r90
Teensy1: Top Overlay "GND" at 32.893,75.565 h0.81 r90; Mechanical 13 "GND" at 32.893,75.565 h0.81 r90
U2: Mechanical 7 "0.197in/5mm" at 88.082,80.931 h0.64 r90
U11: Top Overlay "Designator9" at 170.383,96.164 h1.27 r90